# Allegro board PE300_R11_Board_source_file.brd
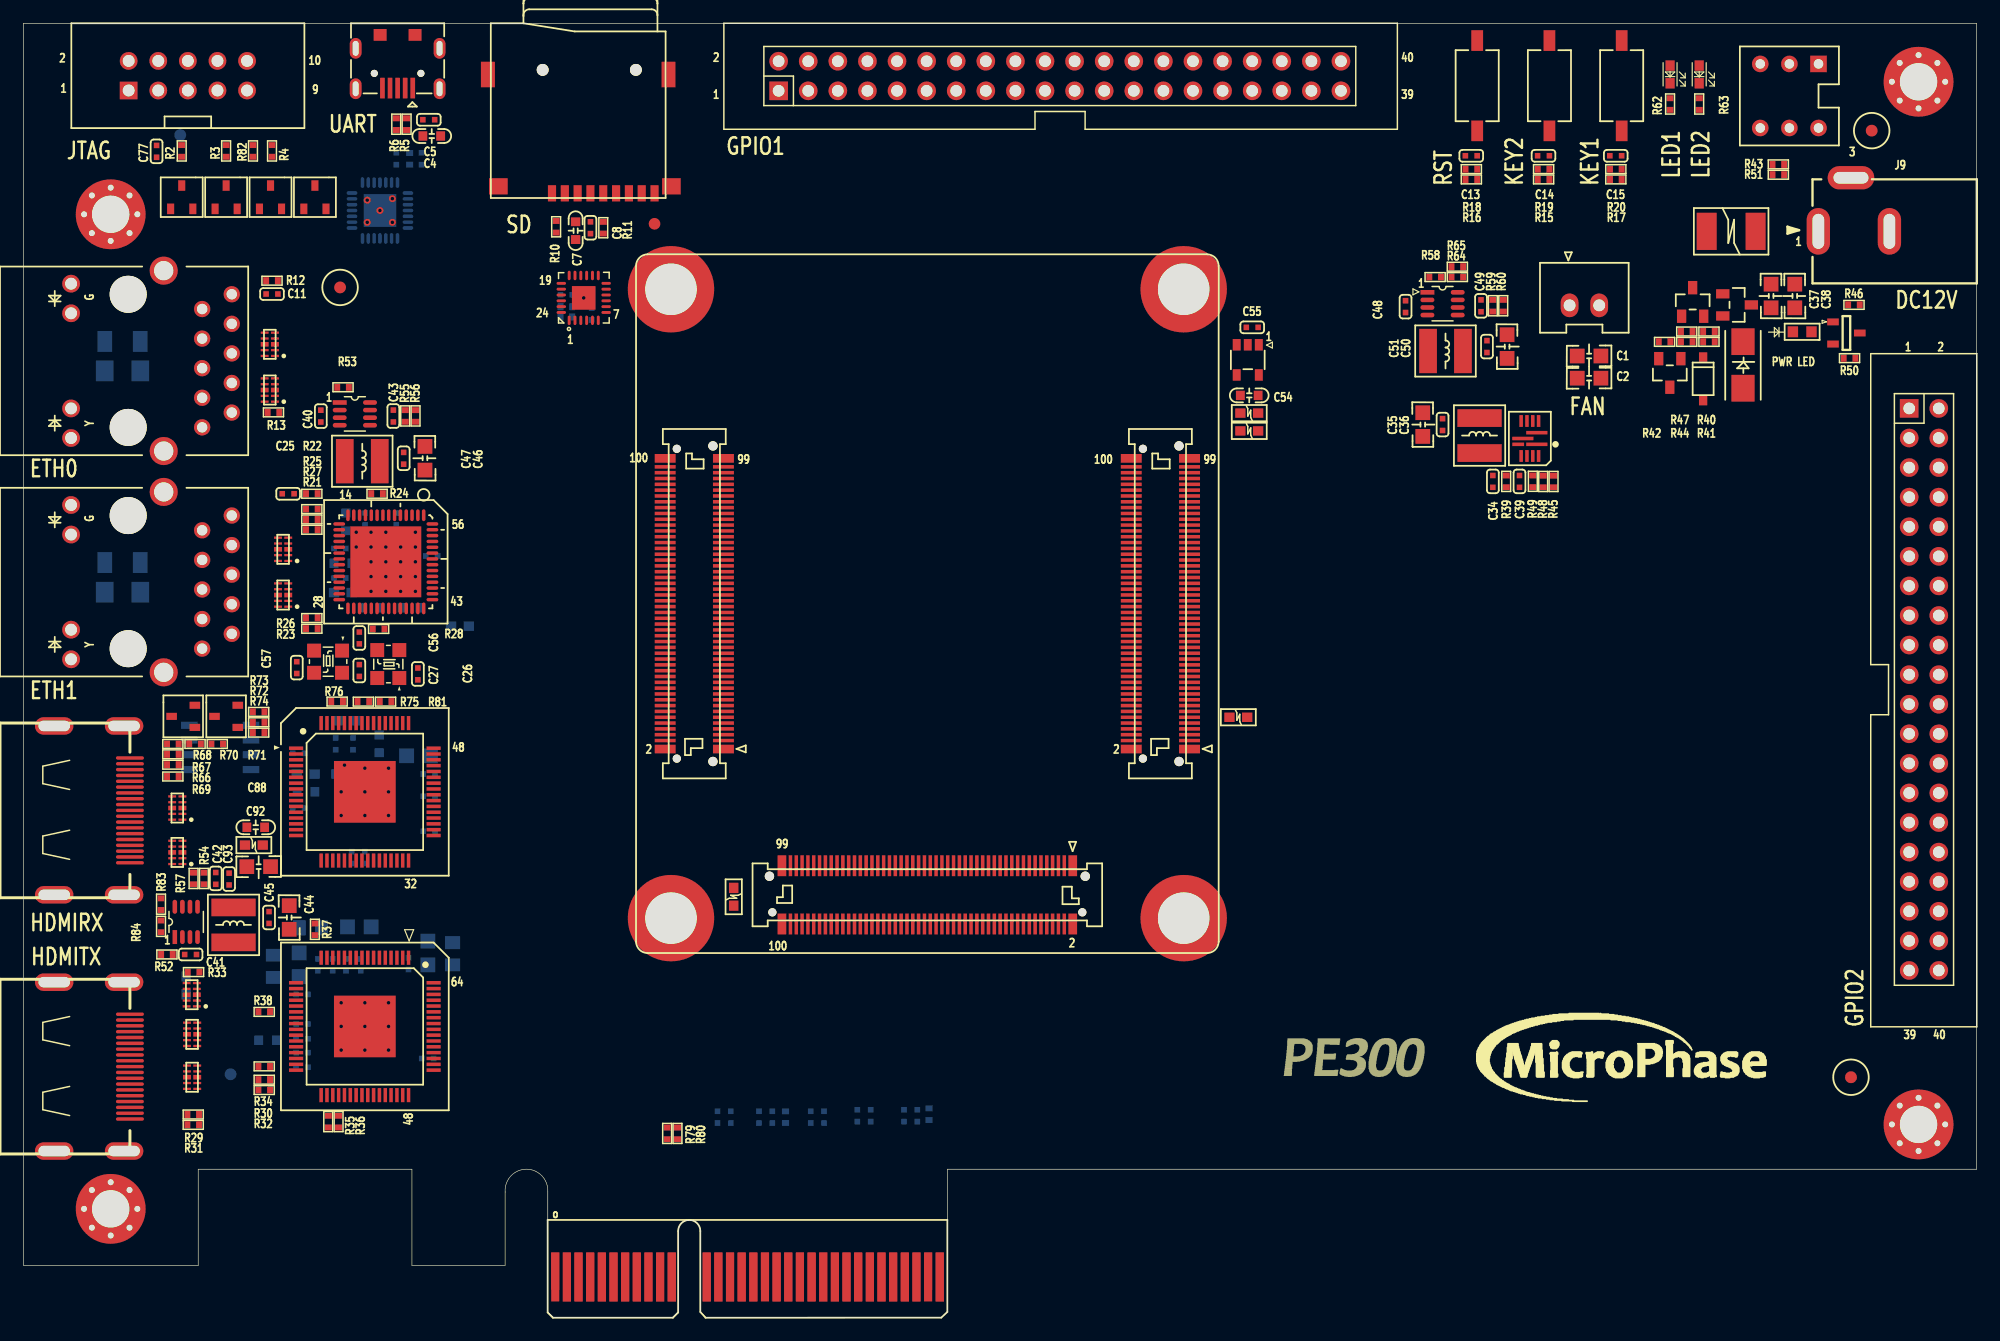
[diagram p0: board, top side]
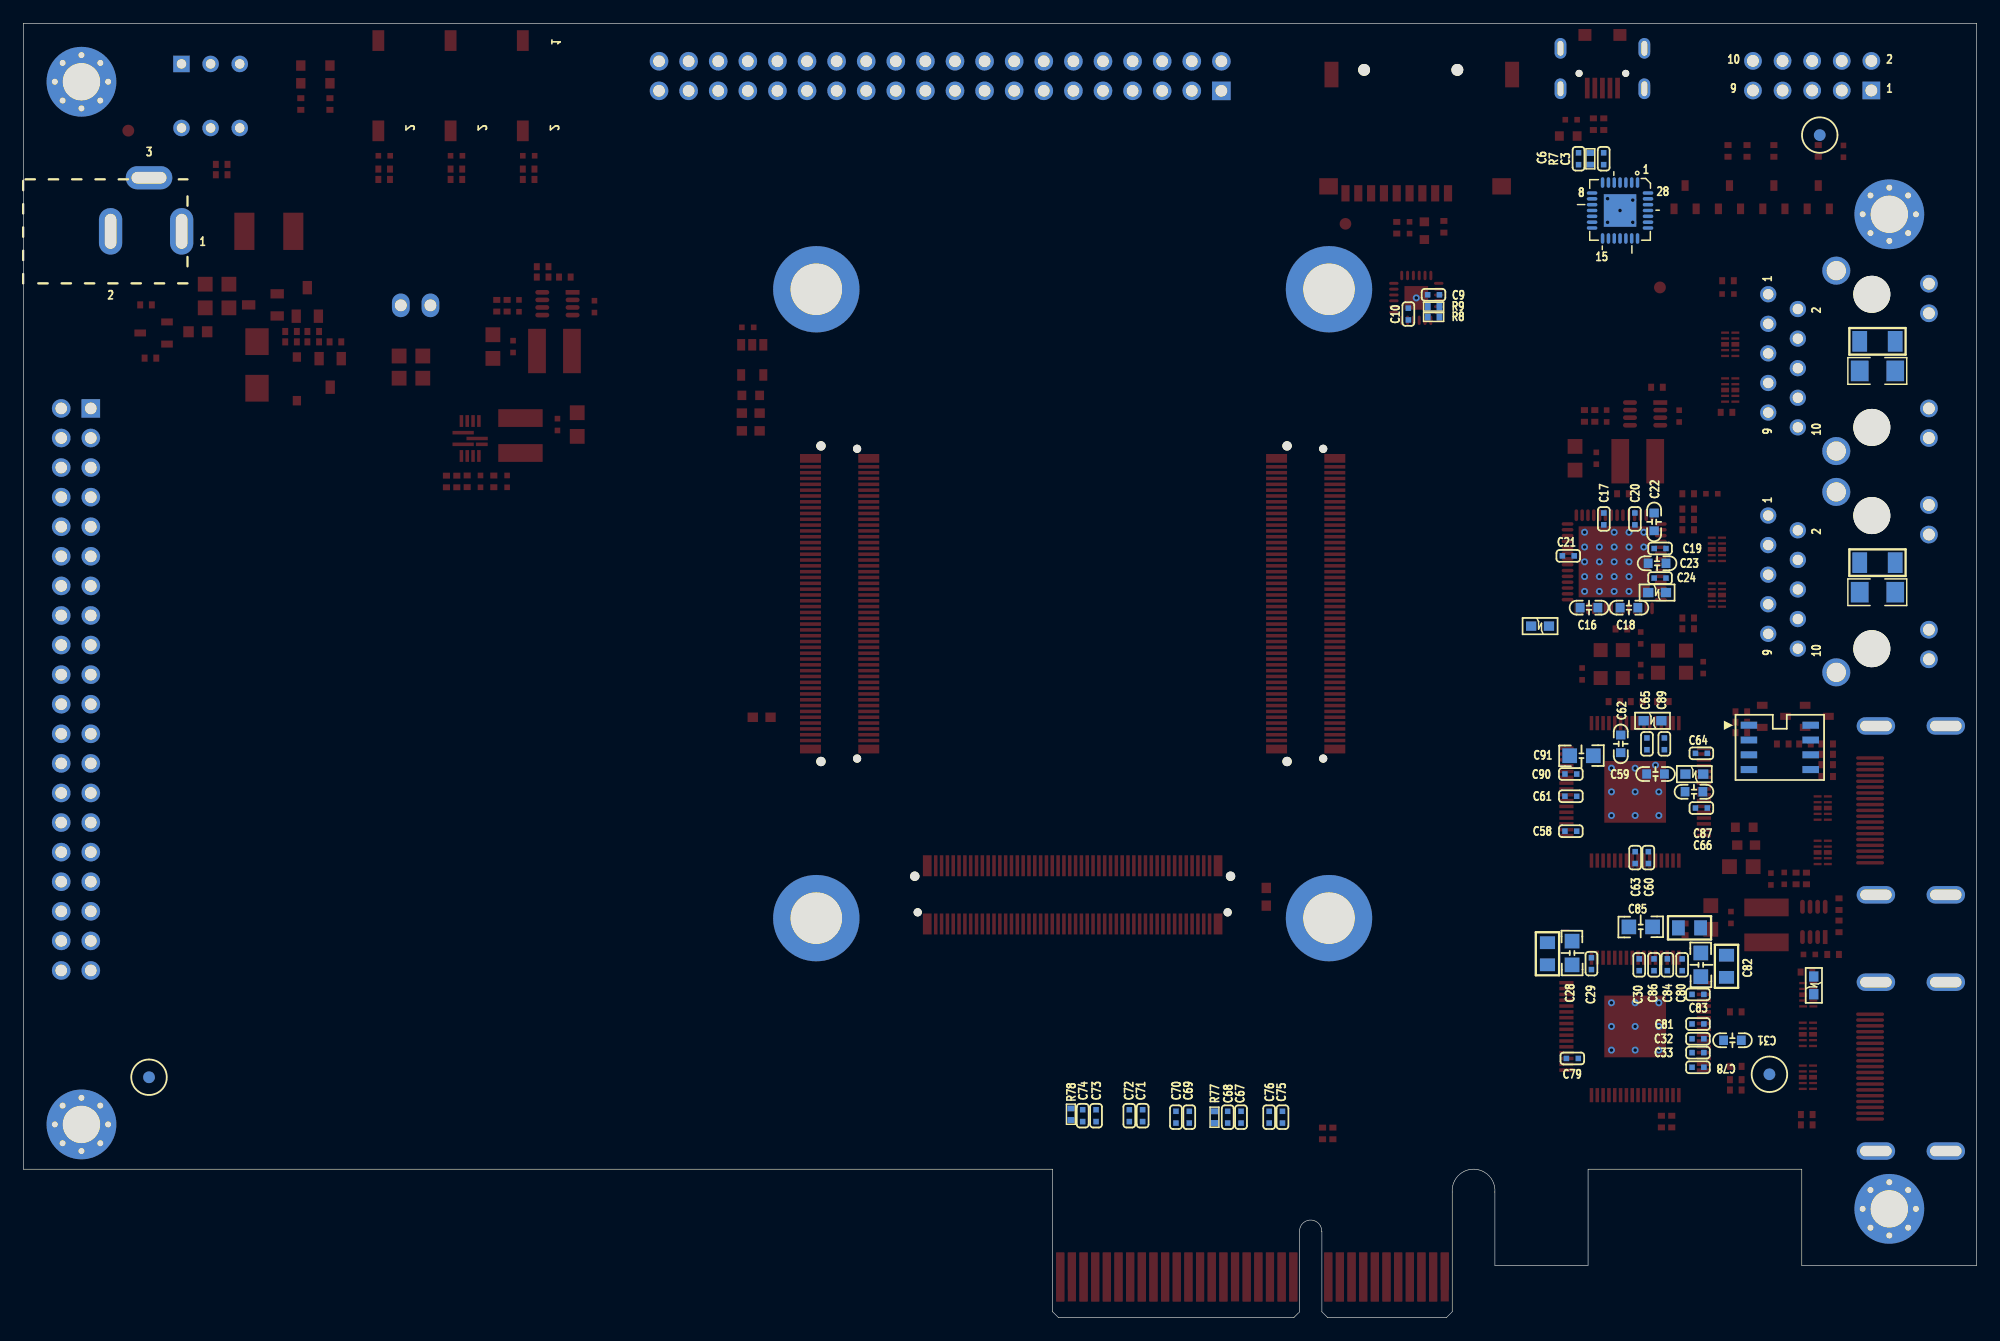
[diagram p1: board, bottom side, seen from below]

Outline 167.64 x 111.15 mm; copper layers: TOP, GND02, VCC03, BOTTOM. Coordinates in mm from the lower left corner of the outline.
Outline path: 0,111.15 167.64,111.15 167.64,12.75 79.3,12.75 79.3,0.51 78.79,0 58.61,0 58.12,0.5 58.12,7.42 arc(57.16,8.38) 56.21,7.42 56.2,7.42 56.2,0.51 55.69,0 45.52,0 45.01,0.51 45.01,10.79 arc(43.18,12.75) 41.35,10.79 41.35,4.5 33.35,4.5 33.35,12.75 15.01,12.75 15.01,4.5 0,4.5 0,111.15

## Design rules (mm)
net group DIFFPAIR8: nets N18052822 N18052826
net group DIFFPAIR9: nets USB2UART_DM USB2UART_DP
net group DIFFPAIR10: nets N18612501 N18612505
net group DIFFPAIR11: nets N18612495 N18612509
net group DIFFPAIR12: nets N18639230 N18639232
net group DIFFPAIR13: nets N18612503 N18612507
net group DIFFPAIR14: nets N18612497 N18612499
net group GPIO2_17: nets GPIO2_17N GPIO2_17P
net group PCIE_CLK_: nets PCIE_CLK_N PCIE_CLK_P
net group PCIE_PRSNTN_X4: nets N18612627 PCIE_PRSNTN_X4
net group PCIE_RX0_: nets PCIE_RX0_N PCIE_RX0_P
net group PCIE_RX1_: nets PCIE_RX1_N PCIE_RX1_P
net group PCIE_RX2_: nets PCIE_RX2_N PCIE_RX2_P
net group PCIE_RX3_: nets PCIE_RX3_N PCIE_RX3_P
net group PCIE_TX0_: nets PCIE_TX0_N PCIE_TX0_P
net group PCIE_TX1_: nets PCIE_TX1_N PCIE_TX1_P
net group PCIE_TX2_: nets PCIE_TX2_N PCIE_TX2_P
net group PCIE_TX3_: nets PCIE_TX3_N PCIE_TX3_P
net group TMDS_RX0_: nets TMDS_RX0_N TMDS_RX0_P
net group TMDS_RX1_: nets TMDS_RX1_N TMDS_RX1_P
net group TMDS_RX2_: nets TMDS_RX2_N TMDS_RX2_P
net group TMDS_RXC_: nets TMDS_RXC_N TMDS_RXC_P
net group VCC_1V0: nets N18080938 VCC_1V0
net group VCC_1V8: nets N18080771 VCC_1V8
net group XADC_V: nets XADC_VN XADC_VP
net group DIFF-LOCAL: nets ETH0_MDI0_N ETH0_MDI0_P ETH0_MDI1_N ETH0_MDI1_P ETH0_MDI2_N ETH0_MDI2_P ETH0_MDI3_N ETH0_MDI3_P ETH1_MDI0_N ETH1_MDI0_P ETH1_MDI1_N ETH1_MDI1_P ETH1_MDI2_N ETH1_MDI2_P ETH1_MDI3_N ETH1_MDI3_P GPIO1_0N GPIO1_0P GPIO1_1N GPIO1_1P GPIO1_2N GPIO1_2P GPIO1_3N GPIO1_3P GPIO1_4N GPIO1_4P GPIO1_5N GPIO1_5P GPIO1_6N GPIO1_6P GPIO1_7N GPIO1_7P GPIO1_8N GPIO1_8P GPIO1_9N GPIO1_9P GPIO1_10N GPIO1_10P GPIO1_11N GPIO1_11P GPIO1_12N GPIO1_12P GPIO1_13N GPIO1_13P GPIO1_14N GPIO1_14P GPIO1_15N GPIO1_15P GPIO1_16N GPIO1_16P GPIO1_17N GPIO1_17P GPIO2_0N GPIO2_0P GPIO2_1N GPIO2_1P GPIO2_2N GPIO2_2P GPIO2_3N GPIO2_3P GPIO2_4N GPIO2_4P GPIO2_5N GPIO2_5P GPIO2_6N GPIO2_6P GPIO2_7N GPIO2_7P GPIO2_8N GPIO2_8P GPIO2_9N GPIO2_9P GPIO2_10N GPIO2_10P GPIO2_11N GPIO2_11P GPIO2_12N GPIO2_12P GPIO2_13N GPIO2_13P GPIO2_14N GPIO2_14P GPIO2_15N GPIO2_15P GPIO2_16N GPIO2_16P TMDS_TX0_N TMDS_TX0_P TMDS_TX1_N TMDS_TX1_P TMDS_TX2_N TMDS_TX2_P TMDS_TXC_N TMDS_TXC_P
net group HDMI: nets HDMI_RX_DE HDMI_RX_HS HDMI_RX_LLC HDMI_RX_P0 HDMI_RX_P1 HDMI_RX_P2 HDMI_RX_P3 HDMI_RX_P4 HDMI_RX_VS
net group HDMI_TX: nets HDMI_TX_CLK HDMI_TX_DE HDMI_TX_HS HDMI_TX_VS

## Placement (name value [footprint] x y rotation side)
B1  BLM18PG121SN1D  [0603L]  105.21 76.15 180 top
B2  BLM18PG121SN1D  [0603L]  104.27 51.56 180 top
B3  BLM18PG121SN1D  [0603L]  60.97 36.14 90 top
B4  BLM18PG121SN1D  [0603L]  37.47 59.38 0 bottom
B5  BLM18PG121SN1D  [0603L]  27.43 62.26 0 bottom
B8  BLM18PG121SN1D(NC)  [0603L]  105.21 77.67 180 top
B9  BLM18PG121SN1D  [0603L]  27.82 51.26 180 bottom
B10  BLM18PG121SN1D  [0603L]  19.79 40.58 0 top
B11  BLM18PG121SN1D  [0603L]  24.23 46.68 180 bottom
C1  10uF/25V  [0805C]  134.37 82.58 270 top
C2  10uF/25V  [0805C]  134.37 80.67 270 top
C3  0.1uf  [0402C]  32.01 99.52 0 bottom
C4  10uF/10V  [0603C]  35.05 101.47 270 top
C5  0.1uf  [0402C]  34.8 102.86 270 top
C6  0.1uf  [0402C]  34.17 99.52 0 bottom
C7  10uF/6.3V  [0603C]  47.4 93.34 180 top
C8  0.1uf  [0402C]  48.67 93.59 180 top
C9  0.1uF  [0402C]  46.62 87.83 270 bottom
C10  0.1uF  [0402C]  48.77 86.18 0 bottom
C11  0.1uf  [0402C]  21.34 87.9 90 top
C12  100pF/1000V  [1206C]  8.52 81.29 180 bottom
C13  0.1uF  [0402C]  124.26 99.77 270 top
C14  0.1uF  [0402C]  130.46 99.77 270 top
C15  0.1uF  [0402C]  136.66 99.77 270 top
C16  10uF/6.3V  [0603C]  33.27 60.97 90 bottom
C17  0.1uF  [0402C]  32 68.59 180 bottom
C18  10uF/6.3V  [0603C]  29.84 60.97 90 bottom
C19  0.1uF  [0402C]  27.17 66.05 270 bottom
C20  0.1uF  [0402C]  29.33 68.59 180 bottom
C21  0.1uF  [0402C]  35.05 65.41 90 bottom
C22  10uF/6.3V  [0603C]  27.68 68.33 180 bottom
C23  10uF/6.3V  [0603C]  27.43 64.78 270 bottom
C24  0.1uF  [0402C]  27.17 63.51 270 bottom
C25  0.1uf  [0402C]  22.73 70.75 90 top
C26  12pF  [0402C]  33.86 55.28 180 top
C27  12pF  [0402C]  28.84 55.57 0 top
C28  47uF/6.3V  [0805C]  34.73 31.32 0 bottom
C29  0.1uF  [0402C]  33.06 30.4 0 bottom
C30  0.1uF  [0402C]  28.96 30.3 0 bottom
C31  10uF/6.3V  [0603C]  20.96 23.82 90 bottom
C32  0.1uF  [0402C]  23.92 23.95 270 bottom
C33  0.1uF  [0402C]  23.92 22.76 270 bottom
C34  0.1uF  [0402C]  126.12 71.81 0 top
C35  47uF/10V  [0805C]  120.1 76.69 180 top
C36  0.1uF  [0402C]  121.8 76.69 180 top
C37  10uF/25V  [0805C]  150 87.73 0 top
C38  10uF/25V  [0805C]  152.03 87.73 0 top
C39  0.1uF  [0402C]  128.4 71.81 0 top
C40  0.1uF  [0402C]  25.53 77.42 180 top
C41  0.1uF  [0402C]  14.36 31.19 270 top
C42  15pF  [0402C]  16.52 37.72 0 top
C43  15pF  [0402C]  31.76 77.42 180 top
C44  47uF/6.3V  [0805C]  22.82 34.36 180 top
C45  0.1uF  [0402C]  21.09 34.36 180 top
C46  47uF/6.3V  [0805C]  34.47 73.8 0 top
C47  0.1uF  [0402C]  32.65 73.8 0 top
C48  0.1uF  [0402C]  118.63 86.82 180 top
C49  15pF  [0402C]  125.1 86.89 180 top
C50  47uF/6.3V  [0805C]  127.34 83.39 180 top
C51  0.1uF  [0402C]  125.61 83.39 180 top
C52  100pF/1000V  [1206C]  8.52 62.29 180 bottom
C54  10uF/6.3V  [0603C]  105.21 79.2 270 top
C55  0.1uF  [0402C]  105.47 85.04 270 top
C56  15pF  [0402C]  28.84 58.37 180 top
C57  15pF  [0402C]  23.47 55.82 180 top
C58  0.1uF  [0402C]  34.83 41.78 90 bottom
C59  10uF/6.3V  [0603C]  27.57 46.68 270 bottom
C60  0.1uF  [0402C]  28.18 39.51 0 bottom
C61  0.1uF  [0402C]  34.83 44.78 90 bottom
C62  10uF/6.3V  [0603C]  30.55 49.27 180 bottom
C63  0.1uF  [0402C]  29.31 39.51 0 bottom
C64  0.1uF  [0402C]  23.63 48.46 270 bottom
C65  0.1uF  [0402C]  28.3 49.27 180 bottom
C66  0.1uF  [0402C]  23.63 43.76 270 bottom
C67  0.1uF  [0402C]  63.13 17.22 180 bottom
C68  0.1uF  [0402C]  64.28 17.22 180 bottom
C69  0.1uF  [0402C]  67.58 17.22 180 bottom
C70  0.1uF  [0402C]  68.72 17.22 180 bottom
C71  0.1uF  [0402C]  71.58 17.35 180 bottom
C72  0.1uF  [0402C]  72.72 17.35 180 bottom
C73  0.1uF  [0402C]  75.58 17.35 180 bottom
C74  0.1uF  [0402C]  76.72 17.35 180 bottom
C75  0.1uF  [0402C]  59.58 17.22 180 bottom
C76  0.1uF  [0402C]  60.72 17.22 180 bottom
C77  0.1uF  [0402C]  11.44 100.15 0 top
C78  0.1uF  [0402C]  23.92 21.51 90 bottom
C79  0.1uF  [0402C]  34.7 22.26 90 bottom
C80  0.1uF  [0402C]  25.28 30.3 0 bottom
C81  0.1uF  [0402C]  23.92 25.22 270 bottom
C82  47uF/6.3V  [0805C]  23.68 30.3 0 bottom
C83  0.1uF  [0402C]  23.92 27.76 270 bottom
C84  0.1uF  [0402C]  26.55 30.3 180 bottom
C85  47uF/6.3V  [0805C]  28.84 33.56 270 bottom
C86  0.1uF  [0402C]  27.69 30.3 180 bottom
C87  10uF/6.3V  [0603C]  24.26 45.16 270 bottom
C88  10uF/6.3V  [0603C]  19.95 42.11 270 top
C89  0.1uF  [0402C]  26.8 49.27 180 bottom
C90  0.1uF  [0402C]  34.83 46.68 90 bottom
C91  47uF/6.3V  [0805C]  33.92 48.25 90 bottom
C92  47uF/6.3V  [0805C]  20.2 38.73 90 top
C93  0.1uF  [0402C]  17.66 37.67 180 top
D1  BAT54S/SOT  [SOT23-236AB]  25.03 96.21 0 top
D2  BAT54S/SOT  [SOT23-236AB]  13.6 96.21 0 top
D3  BAT54S/SOT  [SOT23-236AB]  17.41 96.21 0 top
D4  BAT54S/SOT  [SOT23-236AB]  21.22 96.21 0 top
D5  SS36  [SMA]  147.58 81.81 90 top
D6  RED_LED  [0603LED_AK]  152.66 84.66 180 top
D7  BZX84C13  [SOD123_AK]  144.16 80.62 270 top
D8  GREEN_LED  [0603LED]  141.33 106.75 270 top
D9  GREEN_LED  [0603LED]  143.83 106.75 270 top
F1  2A  [1812F]  146.57 93.28 180 top
F2  SMD0603-050  [0603F]  13.98 28.53 270 bottom
J1  JTAG  [HDR254F-2X5X850]  14.12 106.65 90 top
J3  CON2  [XH2_1X2_2P54MM]  133.97 86.93 270 top
J4  USB_MicroType  [USBMICRO_H]  32.12 105.58 180 top
J5  MicroSD  [TF-15-15B]  47.62 103.65 180 top
J6  HR911130A  [RJ45_HR911130A]  9 82.16 90 top
J7  HR911130A  [RJ45_HR911130A]  9 63.16 90 top
J8  HDMI  [HDMI19S]  9.15 21.56 270 top
J9  DC_JACK  [DC_0050]  160.15 93.28 0 top
J10  HDMI  [HDMI19S]  9.15 43.56 270 top
J11  PCIE_SLOT  [FINGER-PCI-EX4]  70.65 4.2 0 top
JM1  CON50x2 REC  [QT51A01-38200-7H]  97.59 61.31 180 top
JM2  CON50x2 REC  [QT51A01-38200-7H]  77.58 36.31 270 top
JM3  CON50x2 REC  [QT51A01-38200-7H]  57.58 61.31 180 top
JP1  CON40A  [IDC40-2_54A]  88.95 106.62 0 top
JP2  CON40A  [IDC40-2_54A]  163.12 53.95 270 top
K1  SW_2P  [SW2_3X6]  124.77 105.79 270 top
K2  SW_2P  [SW2_3X6]  130.97 105.79 270 top
K3  SW_2P  [SW2_3X6]  137.17 105.79 270 top
L1  1.5uH  [L4020]  124.97 75.75 90 top
L2  1uH  [L4020]  29.09 73.54 0 top
L3  1uH  [L4020]  18.04 33.73 90 top
L4  1uH  [L4020]  122.05 83.01 0 top
L5  10uH  [L0805]  36.84 31.25 90 bottom
L6  10uH  [L0805]  21.47 30.17 90 bottom
L7  10uH  [L0805]  24.65 33.48 180 bottom
M1  Hole  [HOLE32CIR60]  7.5 94.75 0 top
M2  Hole  [HOLE32CIR60]  7.5 9.35 0 top
M3  Hole  [HOLE32CIR60]  162.65 16.6 0 top
M4  Hole  [HOLE32CIR60]  162.65 106.13 0 top
M5  Hole  [HOLE174-292]  55.59 88.31 0 top
M6  Hole  [HOLE174-292]  55.59 34.31 0 top
M7  Hole  [HOLE174-292]  99.59 34.31 0 top
M8  Hole  [HOLE174-292]  99.58 88.31 0 top
NOREF  -  []  151.57 107.66 0 top
NOREF#2  -  []  144.47 93.28 0 top
NOREF#3  -  []  14.25 47.06 0 top
NOREF#4  -  []  14.72 50.69 90 top
NOREF#5  -  [unnamed#2]  156.85 20.65 0 top
NOREF#6  -  [unnamed#2]  27.19 88.47 0 top
NOREF#7  -  []  149.07 107.66 0 top
NOREF#8  -  []  32.11 92.67 90 top
NOREF#9  -  []  18.41 50.69 90 top
NOREF#10  -  []  18.36 95.21 90 top
NOREF#11  -  []  25.98 95.21 90 top
NOREF#12  -  []  77.58 36.31 0 top
NOREF#13  -  []  12.65 95.21 0 top
NOREF#14  -  []  19.55 47.06 90 top
NOREF#15  -  []  24.08 95.21 0 top
NOREF#16  -  [unnamed#2]  158.63 101.93 0 top
NOREF#17  -  []  33.01 93.57 90 top
NOREF#18  -  []  22.17 95.21 90 top
NOREF#19  -  []  19.55 47.06 90 top
NOREF#20  -  []  20.27 95.21 0 top
NOREF#21  -  []  33.01 93.57 90 top
NOREF#22  -  []  16.46 95.21 0 top
NOREF#23  -  []  57.58 61.31 0 top
NOREF#24  -  []  164.32 109.16 90 top
NOREF#25  -  []  14.55 95.21 90 top
NOREF#26  -  []  16.41 51.64 90 top
NOREF#27  -  []  28.21 93.57 90 top
NOREF#28  -  []  12.72 51.64 90 top
NOREF#29  -  []  149.07 102.16 90 top
NOREF#30  -  []  155.82 109.16 0 top
NOREF#31  -  []  77.58 36.31 90 top
NOREF#32  -  []  77.58 36.31 90 top
NOREF#33  -  [unnamed#2]  156.85 20.65 180 bottom
NOREF#34  -  [unnamed#2]  17.79 20.9 180 bottom
NOREF#35  -  [unnamed#2]  13.47 101.55 180 bottom
Q2  -  [AO3415]  143.27 87.22 0 top
Q3  -  [AO3415]  147.08 86.97 270 top
Q4  MMBTA92LT1G  [SOT23-3]  141.3 81.12 180 top
Q5  MMBT5551  [SOT23]  156.46 84.55 0 top
Q6  2N7002  [SOT23-236AB]  17.41 51.64 90 top
Q7  2N7002  [SOT23-236AB]  13.72 51.64 90 top
R2  33R  [0402R]  13.6 100.19 90 top
R3  33R  [0402R]  17.41 100.19 90 top
R4  33R  [0402R]  21.34 100.19 90 top
R5  33R  [0402R]  32.89 102.48 270 top
R6  33R  [0402R]  32.01 102.48 270 top
R7  4.7K  [0402R]  33.15 99.51 270 bottom
R8  4.7K(NC)  [0402R]  46.61 85.93 0 bottom
R9  4.7K  [0402R]  46.61 86.82 180 bottom
R10  4.7K  [0402R]  45.73 93.67 270 top
R11  4.7K(NC)  [0402R]  49.77 93.59 270 top
R12  330R  [0402R]  21.34 89.04 0 top
R13  330R  [0402R]  21.47 77.74 0 top
R14  1M  [1206R]  8.52 83.83 0 bottom
R15  10K  [0402R]  130.47 97.74 0 top
R16  10K  [0402R]  124.27 97.74 0 top
R17  10K  [0402R]  136.67 97.74 0 top
R18  330R  [0402R]  124.27 98.63 0 top
R19  330R  [0402R]  130.47 98.63 0 top
R20  330R  [0402R]  136.67 98.63 0 top
R21  4.7K  [0402R]  24.76 67.66 0 top
R22  330R  [0402R]  24.76 70.75 0 top
R23  330R  [0402R]  24.76 59.16 0 top
R24  4.7K  [0402R]  30.36 70.75 0 top
R25  0R  [0402R]  24.76 69.43 0 top
R26  4.99K 1%  [0402R]  24.76 60.08 0 top
R27  0R(NC)  [0402R]  24.76 68.54 0 top
R28  10M(NC)  [0402R]  30.49 59.14 180 top
R29  2K  [0402R]  14.58 17.45 180 top
R30  0R  [0402R]  20.68 20.44 0 top
R31  2K  [0402R]  14.58 16.56 180 top
R32  0R  [0402R]  20.68 19.55 0 top
R33  10K  [0402R]  14.61 29.68 180 top
R34  2K  [0402R]  20.68 21.58 0 top
R35  4.7K  [0402R]  26.17 16.84 90 top
R36  4.7K  [0402R]  27.06 16.84 90 top
R37  887R 1%  [0402R]  25.03 33.35 90 top
R38  10K  [0402R]  20.68 26.26 0 top
R39  3R3  [0402R]  127.26 71.81 270 top
R40  30K  [0402R]  144.66 84.68 180 top
R41  330R  [0402R]  144.66 83.79 180 top
R42  4.7K  [0402R]  140.85 83.79 0 top
R43  0R(NC)  [0402R]  150.62 99.03 180 top
R44  10K  [0402R]  142.76 83.79 180 top
R45  100K  [0402R]  131.33 71.8 90 top
R46  2K  [0402R]  157.11 86.97 0 top
R47  30K  [0402R]  142.76 84.68 180 top
R48  33K  [0402R]  130.44 71.8 270 top
R49  4.7K  [0402R]  129.55 71.82 270 top
R50  10K  [0402R]  156.73 82.39 180 top
R51  10K  [0402R]  150.62 98.14 180 top
R52  4.7K  [0402R]  12.33 31.19 0 top
R53  4.7K  [0402R]  27.44 79.89 0 top
R54  20K 1%  [0402R]  15.5 37.71 90 top
R55  6.8K 1%  [0402R]  32.77 77.43 270 top
R56  10K 1%  [0402R]  33.66 77.43 90 top
R57  10K 1%  [0402R]  14.61 37.71 270 top
R58  4.7K  [0402R]  121.17 89.36 0 top
R59  45.3K 1%  [0402R]  126.12 86.89 270 top
R60  10K 1%  [0402R]  127.01 86.89 90 top
R61  1M  [1206R]  8.52 64.83 0 bottom
R62  330R  [0402R]  141.33 104.21 90 top
R63  330R  [0402R]  143.83 104.21 90 top
R64  0R  [0402R]  123.07 89.36 0 top
R65  0R(NC)  [0402R]  123.07 90.24 0 top
R66  47K  [0402R]  12.83 47.49 180 top
R67  47K  [0402R]  12.83 48.38 180 top
R68  1K  [0402R]  12.83 49.26 180 top
R69  0R(NC)  [0402R]  12.83 46.47 180 top
R70  10K(NC)  [0402R]  14.74 49.26 0 top
R71  100K  [0402R]  16.64 49.26 0 top
R72  0R  [0402R]  20.2 51.13 180 top
R73  0R(NC)  [0402R]  20.2 52.02 180 top
R74  1K(NC)  [0402R]  20.2 50.24 0 top
R75  4.7K  [0402R]  29.19 52.9 180 top
R76  10M(NC)  [0402R]  26.93 52.91 180 top
R77  0R(NC)  [0402R]  65.41 17.22 270 bottom
R78  0R  [0402R]  77.74 17.47 270 bottom
R79  0R(NC)  [0402R]  55.25 15.82 270 top
R80  4.7K(NC)  [0402R]  56.14 15.82 90 top
R81  10K  [0402R]  31.09 52.9 0 top
R82  33R  [0402R]  19.71 100.19 90 top
R83  0R(NC)  [0402R]  11.82 35.51 270 top
R84  0R  [0402R]  11.82 33.6 90 top
SW1  SW  [SW6-2P5-5P5]  151.57 104.91 180 top
TP1  TP_R  [TP4]  54.17 93.93 180 top
U1  CP2102  [QFN28-0P5-5X5]  30.61 95.07 270 bottom
U3  TXS02612RTWR  [QFN24-0P5-4X4]  48.09 87.57 90 top
U6  88E1512  [QFN56-0P5-8X8TS]  31.11 64.91 270 top
U7  ADV7513  [QFP64_10X10_0P5_T]  29.31 25.01 270 top
U10  TPD4E05U06  [ESD_0524P]  14.46 27.73 90 top
U15  -  [NB679]  129.29 75.49 270 top
U16  MP2143DJ  [SOT23-8]  28.45 77.61 270 top
U17  MP2143DJ  [SOT23-8]  13.98 33.98 0 top
U18  MP2143DJ  [SOT23-8]  121.8 87.07 270 top
U19  TPD4E05U06  [ESD_0524P]  21.15 79.66 90 top
U20  TPD4E05U06  [ESD_0524P]  21.15 83.58 90 top
U21  TPD4E05U06  [ESD_0524P]  22.3 62.05 90 top
U22  TPD4E05U06  [ESD_0524P]  22.3 65.98 90 top
U23  SPX3819M5-X-X(NC)  [SOT-23]  105.08 82.24 180 top
U24  ADV7611BSWZ  [QFP64_10X10_0P5_T]  29.31 45.15 0 top
U25  24C02(NC)  [SO8N-1P27-3P9X4P9]  16.9 48.97 270 bottom
U28  TPD4E05U06  [ESD_0524P]  14.49 24.33 90 top
U29  TPD4E05U06  [ESD_0524P]  14.49 20.65 90 top
U30  TPD4E05U06  [ESD_0524P]  13.22 39.95 90 top
U31  TPD4E05U06  [ESD_0524P]  13.22 43.76 90 top
Y2  25M  [XTAL3225M]  31.32 56.13 90 top
Y3  28.63636M  [XTAL3225M]  26.15 56.33 180 top

## Library data of the parts
B1-B5 B8-B11 = BEAD
C1 C2 C15-C21 C23 C24 C26-C34 C40 C44 C45 C47-C52 C54 C57 C64 C66-C93 = CAP
C3-C8 C11 C25 C38 = C
C9 C10 C12-C14 C22 C35 C36 C39 C41-C43 C46 C55 C56 C58-C63 C65 = CAP: signal model: CAP_0402C_0.1UF_0.1uF
C37 = C: signal model: CAP_0402C_0.1UF_0.1uF
D1-D4 = BAT54S/SOT
D5 = DIODE
D6 D8 D9 = LED
D7 = TVS_SMAJ5_0.0CA_5V: Tolerance: *; User Part Number: *
F1 F2 = FUSE
J1 = CON10A: Tolerance: *; User Part Number: *
J3 = CON2: User Part Number: *; Tolerance: *
J4 = USB_MicroType
J5 = MicroSD_1
J6 J7 = RJ45_HR911130A: Tolerance: *; User Part Number: *
J8 J10 = HDMI
J9 = POWER_DC-JACK: Tolerance: ?; User Part Number: *********
J11 = PCIE_SLOT
JM1-JM3 = CON 50x2: User Part Number: *; Tolerance: *
JP1 JP2 = CON40A
K1-K3 = SW_2P
L1-L4 = L: User Part Number: *; Tolerance: *
L5-L7 = L: Tolerance: ?; User Part Number: L0805
M1-M8 TP1 = TP_R
Q2 Q3 = AO3415
Q4 = MMBT5401L_0
Q5 = NPN2
Q6 Q7 = N_2N7002
R2-R4 R8 R9 R21 R24-R27 R29-R38 R62 R63 R66-R73 R75 R77 R79-R82 = RESISTOR
R5-R7 R10-R20 R22 R23 R28 R40-R44 R46-R48 R50 R51 R61 R76 = R
R39 R45 R49 R52-R60 R64 R65 R83 R84 = RES
R74 = RESISTOR: signal model: RES_0402R_22R_22R
R78 = RESISTOR: signal model: RES_0402R_0R(NC)_0R(NC)
SW1 = SW5
U1 = USB2UART_CP2102
U3 = LevelShift_TXS02612_SDIO
U6 = 88E1512
U7 = ADV7513: User Part Number: *; Tolerance: *
U10 U19-U22 U28-U31 = RCLAMP0564P
U15 = NB679: User Part Number: *; Tolerance: *
U16-U18 = MP2143
U23 = SPX3819M5-2-5
U24 = ADV7611BSWZ: User Part Number: *; Tolerance: *
U25 = M24C02
Y2 Y3 = CRYSTAL_4pin

## Footprints (pads in the part's own frame, mm; a bottom-side part is the same pattern mirrored in y, then rotated)
0402C
  rect 0.483x0.483 smd: 1(0,0.508) 2(0,-0.508)
0402R
  rect 0.508x0.61 smd: 1(-0.5,0) 2(0.5,0)
0603C
  rect 0.813x0.762 smd: 1(0,0.762) 2(0,-0.762)
0603F
  rect 0.889x0.813 smd: 1(-0.762,0) 2(0.762,0)
0603L
  rect 0.889x0.813 smd: 1(-0.762,0) 2(0.762,0)
0603LED
  rect 0.9x0.8 smd: A(-0.762,0) K(0.762,0)
0603LED_AK
  rect 0.9x0.95 smd: A(0.8,0) K(-0.8,0)
0805C
  rect 1.27x1.27 smd: 1(0,1.016) 2(0,-1.016)
1206C
  rect 1.524x1.778 smd: 1(-1.524,0) 2(1.524,0)
1206R
  rect 1.27x1.778 smd: 1(-1.524,0) 2(1.524,0)
1812F
  rect 1.727x3.2 smd: 1(-2.1,0) 2(2.1,0)
AO3415
  rect 0.8x1.15 smd: D(0,1.225) G(-0.95,-1.225) S(0.95,-1.225)
DC_0050
  oval 2x4 hole 1x3: 1(-6.1,0) 2(0,0)
  oval 4x2 hole 3x1: 3(-3.3,4.6)
ESD_0524P
  rect 0.2x0.68 smd: 1(-1,-0.44) 2(-0.5,-0.44) 4(0.5,-0.44) 5(1,-0.44) 6(1,0.44) 7(0.5,0.44) 9(-0.5,0.44) 10(-1,0.44)
  rect 0.4x0.68 smd: 3(0,-0.44) 8(0,0.44)
FINGER-PCI-EX4
  rect 0.7x3.2 smd: A1(-25,-0.2) B17(-7,-0.2) B31(7,-0.2)
  rect 0.7x4.2 smd: A2(-24,-0.7) A3(-23,-0.7) A4(-22,-0.7) A5(-21,-0.7) A6(-20,-0.7) A7(-19,-0.7) A8(-18,-0.7) A9(-17,-0.7) A10(-16,-0.7) A11(-15,-0.7) A12(-12,-0.7) A13(-11,-0.7) A14(-10,-0.7) A15(-9,-0.7) A16(-8,-0.7) A17(-7,-0.7) A18(-6,-0.7) A19(-5,-0.7) A20(-4,-0.7) A21(-3,-0.7) A22(-2,-0.7) A23(-1,-0.7) A24(0,-0.7) A25(1,-0.7) A26(2,-0.7) A27(3,-0.7) A28(4,-0.7) A29(5,-0.7) A30(6,-0.7) A31(7,-0.7) A32(8,-0.7) B1(-25,-0.7) B2(-24,-0.7) B3(-23,-0.7) B4(-22,-0.7) B5(-21,-0.7) B6(-20,-0.7) B7(-19,-0.7) B8(-18,-0.7) B9(-17,-0.7) B10(-16,-0.7) B11(-15,-0.7) B12(-12,-0.7) B13(-11,-0.7) B14(-10,-0.7) B15(-9,-0.7) B16(-8,-0.7) B18(-6,-0.7) B19(-5,-0.7) B20(-4,-0.7) B21(-3,-0.7) B22(-2,-0.7) B23(-1,-0.7) B24(0,-0.7) B25(1,-0.7) B26(2,-0.7) B27(3,-0.7) B28(4,-0.7) B29(5,-0.7) B30(6,-0.7) B32(8,-0.7)
HDMI19S
  oval 0.3x2.4 smd: 1(4.5,0) 2(4,0) 3(3.5,0) 4(3,0) 5(2.5,0) 6(2,0) 7(1.5,0) 8(1,0) 9(0.5,0) 10(0,0) 11(-0.5,0) 12(-1,0) 13(-1.5,0) 14(-2,0) 15(-2.5,0) 16(-3,0) 17(-3.5,0) 18(-4,0) 19(-4.5,0)
  oval 1.5x3.3 hole 0.9x2.7: BO1(7.25,-0.5) BO2(-7.25,-0.5) BO3(7.25,-6.5) BO4(-7.25,-6.5)
HDR254F-2X5X850
  rect 1.524x1.524 hole 1.016: 1(-1.27,5.08)
  round 1.524 hole 1.016: 2(1.27,5.08) 3(-1.27,2.54) 4(1.27,2.54) 5(-1.27,0) 6(1.27,0) 7(-1.27,-2.54) 8(1.27,-2.54) 9(-1.27,-5.08) 10(1.27,-5.08)
HOLE32CIR60
  round 1.016 hole 0.508: (-2.286,0) (-1.617,1.617) (-1.617,-1.617) (0,2.286) (0,-2.286) (1.617,1.617) (1.617,-1.617) (2.286,0)
  round 5.994 hole 3.2: 1(0,0)
HOLE174-292
  round 7.417 hole 4.42 unplated: (0,0)
IDC40-2_54A
  rect 1.6x1.6 hole 1: 1(-24.13,-1.27)
  round 1.6 hole 1: 2(-24.13,1.27) 3(-21.59,-1.27) 4(-21.59,1.27) 5(-19.05,-1.27) 6(-19.05,1.27) 7(-16.51,-1.27) 8(-16.51,1.27) 9(-13.97,-1.27) 10(-13.97,1.27) 11(-11.43,-1.27) 12(-11.43,1.27) 13(-8.89,-1.27) 14(-8.89,1.27) 15(-6.35,-1.27) 16(-6.35,1.27) 17(-3.81,-1.27) 18(-3.81,1.27) 19(-1.27,-1.27) 20(-1.27,1.27) 21(1.27,-1.27) 22(1.27,1.27) 23(3.81,-1.27) 24(3.81,1.27) 25(6.35,-1.27) 26(6.35,1.27) 27(8.89,-1.27) 28(8.89,1.27) 29(11.43,-1.27) 30(11.43,1.27) 31(13.97,-1.27) 32(13.97,1.27) 33(16.51,-1.27) 34(16.51,1.27) 35(19.05,-1.27) 36(19.05,1.27) 37(21.59,-1.27) 38(21.59,1.27) 39(24.13,-1.27) 40(24.13,1.27)
L0805
  rect 1.1x1.3 smd: 1(-0.95,0) 2(0.95,0)
L4020
  rect 1.524x3.81 smd: 1(-1.5,0) 2(1.5,0)
NB679
  rect 0.305x1.829 smd: 1(0.5,0.6) 2(-0.5,0.6) 7(0,-0.6)
  rect 1.016x0.305 smd: 3(-1.5,0.75) 4(-1.5,0.25) 5(-1.5,-0.25) 6(-1.5,-0.75) 9(1.5,-0.75) 10(1.5,-0.25) 11(1.5,0.25) 12(1.5,0.75)
  rect 0.305x1.016 smd: 8(0.5,-1)
QFN24-0P5-4X4
  oval 0.813x0.254 smd: 1(-1.925,1.25) 2(-1.925,0.75) 3(-1.925,0.25) 4(-1.925,-0.25) 5(-1.925,-0.75) 6(-1.925,-1.25) 13(1.925,-1.25) 14(1.925,-0.75) 15(1.925,-0.25) 16(1.925,0.25) 17(1.925,0.75) 18(1.925,1.25)
  oval 0.254x0.813 smd: 7(-1.25,-1.925) 8(-0.75,-1.925) 9(-0.25,-1.925) 10(0.25,-1.925) 11(0.75,-1.925) 12(1.25,-1.925) 19(1.25,1.925) 20(0.75,1.925) 21(0.25,1.925) 22(-0.25,1.925) 23(-0.75,1.925) 24(-1.25,1.925)
  rect 2.032x2.032 smd: 25(0,0)
QFN28-0P5-5X5
  oval 0.914x0.305 smd: 1(-2.4,1.5) 2(-2.4,1.001) 3(-2.4,0.5) 4(-2.4,0.001) 5(-2.4,-0.5) 6(-2.4,-1) 7(-2.4,-1.5) 15(2.4,-1.5) 16(2.4,-1) 17(2.4,-0.5) 18(2.4,0) 19(2.4,0.5) 20(2.4,1.001) 21(2.4,1.5)
  oval 0.305x0.914 smd: 8(-1.5,-2.4) 9(-1,-2.4) 10(-0.5,-2.4) 11(0,-2.4) 12(0.5,-2.4) 13(1,-2.4) 14(1.5,-2.4) 22(1.5,2.4) 23(1,2.4) 24(0.5,2.4) 25(0,2.4) 26(-0.5,2.4) 27(-1,2.4) 28(-1.5,2.4)
  rect 2.8x2.8 smd: 29(0,0)
QFN56-0P5-8X8TS
  oval 1.016x0.305 smd: 1(-4,3.25) 2(-4,2.75) 3(-4,2.25) 4(-4,1.75) 5(-4,1.25) 6(-4,0.75) 7(-4,0.25) 8(-4,-0.25) 9(-4,-0.75) 10(-4,-1.25) 11(-4,-1.75) 12(-4,-2.25) 13(-4,-2.75) 14(-4,-3.25) 29(4,-3.25) 30(4,-2.75) 31(4,-2.25) 32(4,-1.75) 33(4,-1.25) 34(4,-0.75) 35(4,-0.25) 36(4,0.25) 37(4,0.75) 38(4,1.25) 39(4,1.75) 40(4,2.25) 41(4,2.75) 42(4,3.25)
  oval 0.305x1.016 smd: 15(-3.25,-4) 16(-2.75,-4) 17(-2.25,-4) 18(-1.75,-4) 19(-1.25,-4) 20(-0.75,-4) 21(-0.25,-4) 22(0.25,-4) 23(0.75,-4) 24(1.25,-4) 25(1.75,-4) 26(2.25,-4) 27(2.75,-4) 28(3.25,-4) 43(3.25,4) 44(2.75,4) 45(2.25,4) 46(1.75,4) 47(1.25,4) 48(0.75,4) 49(0.25,4) 50(-0.25,4) 51(-0.75,4) 52(-1.25,4) 53(-1.75,4) 54(-2.25,4) 55(-2.75,4) 56(-3.25,4)
  rect 6.096x6.096 smd: 57(0,0)
QFP64_10X10_0P5_T
  rect 1.219x0.305 smd: 1(-5.9,3.75) 2(-5.9,3.25) 3(-5.9,2.75) 4(-5.9,2.25) 5(-5.9,1.75) 6(-5.9,1.25) 7(-5.9,0.75) 8(-5.9,0.25) 9(-5.9,-0.25) 10(-5.9,-0.75) 11(-5.9,-1.25) 12(-5.9,-1.75) 13(-5.9,-2.25) 14(-5.9,-2.75) 15(-5.9,-3.25) 16(-5.9,-3.75) 33(5.9,-3.75) 34(5.9,-3.25) 35(5.9,-2.75) 36(5.9,-2.25) 37(5.9,-1.75) 38(5.9,-1.25) 39(5.9,-0.75) 40(5.9,-0.25) 41(5.9,0.25) 42(5.9,0.75) 43(5.9,1.25) 44(5.9,1.75) 45(5.9,2.25) 46(5.9,2.75) 47(5.9,3.25) 48(5.9,3.75)
  rect 0.305x1.219 smd: 17(-3.75,-5.9) 18(-3.25,-5.9) 19(-2.75,-5.9) 20(-2.25,-5.9) 21(-1.75,-5.9) 22(-1.25,-5.9) 23(-0.75,-5.9) 24(-0.25,-5.9) 25(0.25,-5.9) 26(0.75,-5.9) 27(1.25,-5.9) 28(1.75,-5.9) 29(2.25,-5.9) 30(2.75,-5.9) 31(3.25,-5.9) 32(3.75,-5.9) 49(3.75,5.9) 50(3.25,5.9) 51(2.75,5.9) 52(2.25,5.9) 53(1.75,5.9) 54(1.25,5.9) 55(0.75,5.9) 56(0.25,5.9) 57(-0.25,5.9) 58(-0.75,5.9) 59(-1.25,5.9) 60(-1.75,5.9) 61(-2.25,5.9) 62(-2.75,5.9) 63(-3.25,5.9) 64(-3.75,5.9)
  rect 5.3x5.3 smd: 65(0,0)
QT51A01-38200-7H
  round 0.8 hole 0.8 unplated: (-1.6,13.55) (-1.6,-13.55)
  round 0.7 hole 0.7 unplated: (1.5,13.3) (1.5,-13.3)
  rect 1.8x0.75 smd: 1(-2.5,12.479) 2(2.5,12.479) 99(-2.5,-12.479) 100(2.5,-12.479)
  rect 1.8x0.305 smd: 3(-2.5,11.75) 4(2.5,11.75) 5(-2.5,11.25) 6(2.5,11.25) 7(-2.5,10.75) 8(2.5,10.75) 9(-2.5,10.25) 10(2.5,10.25) 11(-2.5,9.75) 12(2.5,9.75) 13(-2.5,9.25) 14(2.5,9.25) 15(-2.5,8.75) 16(2.5,8.75) 17(-2.5,8.25) 18(2.5,8.25) 19(-2.5,7.75) 20(2.5,7.75) 21(-2.5,7.25) 22(2.5,7.25) 23(-2.5,6.75) 24(2.5,6.75) 25(-2.5,6.25) 26(2.5,6.25) 27(-2.5,5.75) 28(2.5,5.75) 29(-2.5,5.25) 30(2.5,5.25) 31(-2.5,4.75) 32(2.5,4.75) 33(-2.5,4.25) 34(2.5,4.25) 35(-2.5,3.75) 36(2.5,3.75) 37(-2.5,3.25) 38(2.5,3.25) 39(-2.5,2.75) 40(2.5,2.75) 41(-2.5,2.25) 42(2.5,2.25) 43(-2.5,1.75) 44(2.5,1.75) 45(-2.5,1.25) 46(2.5,1.25) 47(-2.5,0.75) 48(2.5,0.75) 49(-2.5,0.25) 50(2.5,0.25) 51(-2.5,-0.25) 52(2.5,-0.25) 53(-2.5,-0.75) 54(2.5,-0.75) 55(-2.5,-1.25) 56(2.5,-1.25) 57(-2.5,-1.75) 58(2.5,-1.75) 59(-2.5,-2.25) 60(2.5,-2.25) 61(-2.5,-2.75) 62(2.5,-2.75) 63(-2.5,-3.25) 64(2.5,-3.25) 65(-2.5,-3.75) 66(2.5,-3.75) 67(-2.5,-4.25) 68(2.5,-4.25) 69(-2.5,-4.75) 70(2.5,-4.75) 71(-2.5,-5.25) 72(2.5,-5.25) 73(-2.5,-5.75) 74(2.5,-5.75) 75(-2.5,-6.25) 76(2.5,-6.25) 77(-2.5,-6.75) 78(2.5,-6.75) 79(-2.5,-7.25) 80(2.5,-7.25) 81(-2.5,-7.75) 82(2.5,-7.75) 83(-2.5,-8.25) 84(2.5,-8.25) 85(-2.5,-8.75) 86(2.5,-8.75) 87(-2.5,-9.25) 88(2.5,-9.25) 89(-2.5,-9.75) 90(2.5,-9.75) 91(-2.5,-10.25) 92(2.5,-10.25) 93(-2.5,-10.75) 94(2.5,-10.75) 95(-2.5,-11.25) 96(2.5,-11.25) 97(-2.5,-11.75) 98(2.5,-11.75)
RJ45_HR911130A
  round 3.175 hole 3.175 unplated: (-5.715,0) (5.715,0)
  round 1.397 hole 0.889: 1(5.72,-8.89) 2(4.45,-6.35) 3(3.18,-8.89) 4(1.91,-6.35) 5(0.64,-8.89) 6(-0.63,-6.35) 7(-1.9,-8.89) 8(-3.17,-6.35) 9(-4.44,-8.89) 10(-5.71,-6.35)
  round 1.524 hole 1.016: 11(6.625,4.9) 12(4.085,4.9) 13(-4.085,4.9) 14(-6.625,4.9)
  round 2.413 hole 1.651: 15(7.745,-3.05) 16(-7.745,-3.05)
SMA
  rect 2.3x2 smd: A(-2,0) K(2,0)
SO8N-1P27-3P9X4P9
  rect 0.61x1.422 smd: 1(-1.905,-2.65) 2(-0.635,-2.65) 3(0.635,-2.65) 4(1.905,-2.65) 5(1.905,2.65) 6(0.635,2.65) 7(-0.635,2.65) 8(-1.905,2.65)
SOD123_AK
  rect 0.813x0.711 smd: A(1.875,0) K(-1.875,0)
SOT23
  rect 1x0.6 smd: 1(-1.15,0.95) 2(-1.15,-0.95) 3(1.15,0)
SOT23-3
  rect 0.8x1.15 smd: 1(-0.95,-1.225) 2(0.95,-1.225) 3(0,1.225)
SOT23-8
  rect 0.4x1.2 smd: 1(-0.975,-1.3)
  oval 0.4x1.2 smd: 2(-0.325,-1.3) 3(0.325,-1.3) 4(0.975,-1.3) 5(0.975,1.3) 6(0.325,1.3) 7(-0.325,1.3) 8(-0.975,1.3)
SOT23-236AB
  rect 0.61x0.914 smd: 1(-0.95,-1) 2(0.95,-1) 3(0,1)
SOT-23
  rect 0.686x0.991 smd: 1(-0.95,-1.295) 2(0,-1.295) 3(0.95,-1.295) 4(0.95,1.295) 5(-0.95,1.295)
SW2_3X6
  rect 1.778x1.016 smd: 1(-3.875,0) 2(3.875,0)
SW6-2P5-5P5
  rect 1.422x1.422 hole 0.813: 1(-2.5,-2.75)
  round 1.422 hole 0.813: 2(0,-2.75) 3(2.5,-2.75) 4(-2.5,2.75) 5(0,2.75) 6(2.5,2.75)
TF-15-15B
  round 1.016 hole 1.016 unplated: (-4.95,-3.5) (3.05,-3.5)
  rect 0.7x1.4 smd: 1(2.25,7.1) 2(1.15,7.1) 3(0.05,7.1) 4(-1.05,7.1) 5(-2.15,7.1) 6(-3.25,7.1) 7(-4.35,7.1) 8(-5.45,7.1) 9(-6.55,7.1)
  rect 1.6x1.4 smd: 10(-8,6.5) 11(6.85,6.5)
  rect 1.2x2.2 smd: 12(-7.75,-3.1) 13(7.75,-3.1)
TP4
  round 1 smd: 1(0,0)
unnamed#2
  round 1.016 smd: 1(0,0)
USBMICRO_H
  round 0.61 hole 0.61 unplated: (-2,-1.264) (2,-1.264)
  rect 0.406x1.778 smd: 1(-1.3,0) 2(-0.65,0) 3(0,0) 4(0.65,0) 5(1.3,0)
  oval 1.016x1.778 hole 0.508x1.27: 6(-3.6,0.056) 7(3.6,0.056) 8(-3.6,-3.414) 9(3.6,-3.414)
  rect 1.118x1.016 smd: 10(-1.5,-4.564) 11(1.5,-4.564)
XH2_1X2_2P54MM
  oval 2.032x1.524 hole 1.016: 1(0,-1.27) 2(0,1.27)
XTAL3225M
  rect 1.2x1.2 smd: 1(-1.2,-0.95) 2(1.2,-0.95) 3(1.2,0.95) 4(-1.2,0.95)

## Nets
3.3V_PCIE: J11.A9(+3V3_2) J11.A10(+3V3_3) J11.B8(+3V3_1) R79.1 R80.2
5V_HDMI: F2.2 J8.18(5V0) R29.2 R31.2
5V_HDMI_RX: J10.18(5V0) R66.1 R67.1 R68.1 R71.1 U24.64(RXA_5V) U25.8(VCC)
12V_PCIE: D5.A J11.A2(+12V_4) J11.A3(+12V_5) J11.B1(+12V_1) J11.B2(+12V_2) J11.B3(+12V_3)
GND: C1.1 C2.1 C3.2 C4.1 C5.1 C6.2 C7.1 C8.1 C9.2 C10.2 C11.2 C12.2 C13.2 C14.2 C15.2 C16.2 C17.2 C18.2 C19.2 C20.2 C21.2 C22.2 C23.2 C24.2 C25.2 C26.2 C27.2 C28.2 C29.2 C30.2 C31.2 C32.2 C33.2 C35.1 C36.1 C37.1 C38.1 C39.2 C40.1 C41.1 C44.1 C45.1 C46.1 C47.1 C48.1 C50.1 C51.1 C52.2 C54.2 C55.2 C56.2 C57.2 C58.2 C59.2 C60.2 C61.2 C62.2 C63.2 C64.2 C65.2 C66.2 C77.2 C78.2 C79.2 C80.2 C81.2 C82.2 C83.2 C84.2 C85.2 C86.2 C87.2 C88.2 C89.2 C90.2 C91.2 C92.2 C93.2 D1.1 D2.1 D3.1 D4.1 D7.A J1.2 J1.10 J3.2 J4.5(GND) J4.6 J4.7 J4.8 J4.9 J4.10 J4.11 J5.6(VSS#6) J5.10(VSS#10) J5.11(VSS#11) J5.12(VSS#12) J5.13(VSS#13) J6.12(LED_G-) J7.12(LED_G-) J8.2(D2S) J8.5(D1S) J8.8(D0S) J8.11(CLKS) J8.17(DCC/CECG) J8.BO1 J8.BO2 J8.BO3 J8.BO4 J9.2(GND2) J9.3(GND1) J10.2(D2S) J10.5(D1S) J10.8(D0S) J10.11(CLKS) J10.17(DCC/CECG) J10.BO1 J10.BO2 J10.BO3 J10.BO4 J11.A4(GND12) J11.A12(GND13) J11.A15(GND14) J11.A18(GND15) J11.A20(GND16) J11.A23(GND17) J11.A24(GND18) J11.A27(GND19) J11.A28(GND20) J11.A31(GND21) J11.B4(GND1) J11.B7(GND2) J11.B13(GND3) J11.B16(GND4) J11.B18(GND5) J11.B21(GND6) J11.B22(GND7) J11.B25(GND8) J11.B26(GND9) J11.B29(GND10) J11.B32(GND11) JM1.9 JM1.10 JM1.19 JM1.20 JM1.29 JM1.30 JM1.39 JM1.40 JM1.49 JM1.50 JM1.59 JM1.60 JM1.69 JM1.70 JM1.79 JM1.80 JM1.89 JM1.90 JM1.99 JM1.100 JM2.5 JM2.6 JM2.11 JM2.12 JM2.17 JM2.18 JM2.23 JM2.24 JM2.29 JM2.30 JM2.39 JM2.40 JM2.49 JM2.50 JM2.59 JM2.60 JM2.69 JM2.70 JM2.79 JM2.80 JM2.89 JM2.90 JM2.99 JM2.100 JM3.19 JM3.20 JM3.29 JM3.30 JM3.39 JM3.40 JM3.49 JM3.50 JM3.59 JM3.60 JM3.69 JM3.70 JM3.79 JM3.80 JM3.89 JM3.90 JM3.99 JM3.100 JP1.12 JP1.30 JP2.12 JP2.30 K1.1 K2.1 K3.1 M1.1 M2.1 M3.1 M4.1 Q5.2(E) Q6.2(S) Q7.2(S) R9.1 R14.1 R26.1 R27.1 R30.1 R32.1 R33.2 R37.2 R38.1 R47.2 R48.2 R51.2 R56.1 R57.1 R60.1 R61.1 R70.2 R74.2 U1.3(GND) U1.29(PGND) U3.2(GND#2) U3.11(GND#11) U3.25(PGND) U6.57(PAD) U7.65(EPAD) U10.3(GND#3) U10.8(GND#8) U15.2(PGND) U15.4(NC) U15.10(AGND) U16.4(GND#4) U16.6(GND#6) U17.4(GND#4) U17.6(GND#6) U18.4(GND#4) U18.6(GND#6) U19.3(GND#3) U19.8(GND#8) U20.3(GND#3) U20.8(GND#8) U21.3(GND#3) U21.8(GND#8) U22.3(GND#3) U22.8(GND#8) U23.2(GND) U24.65(EPAD) U25.1(A0) U25.2(A1) U25.3(A2) U25.4(GND) U28.3(GND#3) U28.8(GND#8) U29.3(GND#3) U29.8(GND#8) U30.3(GND#3) U30.8(GND#8) U31.3(GND#3) U31.8(GND#8) Y2.2(GND#2) Y2.4(GND#4) Y3.2(GND#2) Y3.4(GND#4)
PVDD_1V8: B9.2 C65.1 C89.1 U24.57(PVDD)
VCC_1V0: C16.1 C17.1 C43.1 C46.2 C47.2 L2.2 R55.2 U6.6(DVDD#6) U6.42(DVDD#42) U16.5(VOUT)
VCC_1V8: B4.2 B9.1 B10.1 C10.1 C42.1 C44.2 C45.2 C61.1 C62.1 C63.1 C92.1 C93.1 L3.2 L5.2 L6.2 L7.2 R8.2 R54.2 U3.5(VCCA) U17.5(VOUT) U24.24(DVDD) U24.40(DVDD_1) U24.52(DVDD_2) U24.60(DVDD_3)
VCC_3V3: B1.1 B2.1 B3.1 B5.2 B11.1 C7.2 C8.2 C9.1 C20.1 C21.1 C22.1 C31.1 C32.1 C33.1 C49.1 C50.2 C51.2 C58.1 C59.1 C60.1 C90.1 C91.1 D8.A D9.A J5.4(VCC) JP1.29 JP2.29 L4.2 R10.2 R11.2 R13.2 R15.1 R16.1 R17.1 R21.1 R23.2 R24.1 R25.1 R34.1 R35.1 R36.1 R58.2 R59.2 R72.1 R75.2 R81.2 U3.17(VCCB1) U3.21(VCCB0) U6.10(VDDO_SEL) U6.11(VDDO#11) U6.49(VDDO#49) U6.52(VDDO#52) U7.29(DVDD_3V) U18.5(VOUT) U23.3(EN) U24.23(DVDDIO) U24.34(DVDDIO_1) U24.44(DVDDIO_2)
VCC_5V: C35.2 C36.2 C40.2 C41.2 C48.2 C55.1 F2.1 JP1.11 JP2.11 L1.2 R52.2 R53.2 U15.5(VOUT) U16.2(VIN) U17.2(VIN) U18.2(VIN) U23.1(VIN)
VCC_12V: C1.2 C2.2 C37.2 C38.2 D5.K D6.A J3.1 JM3.1 JM3.2 JM3.3 JM3.4 JM3.5 JM3.6 JM3.7 JM3.8 Q3.D R45.1 U15.1(VIN)
VCC_MOD_3V3: C77.1 D1.2 D2.2 D3.2 D4.2 J1.4 J1.6 JM3.11 JM3.13
VCC_UART_3V3: C3.1 R7.1 U1.6(VDD)
VDD_USB2UART_5V: C4.2 C5.2 J4.1(VDD) U1.7(REGIN) U1.8(VBUS)
7513_AVDD_1V8: C80.1 C81.1 C82.1 C83.1 L6.1 U7.15(AVDD#15) U7.19(AVDD#19) U7.25(AVDD#25)
7513_DVDD_1V8: C28.1 C29.1 C30.1 C78.1 C79.1 L5.1 U7.1(DVDD#1) U7.11(DVDD#11) U7.31(DVDD#31) U7.51(DVDD#51)
7513_PVDD_1V8: C84.1 C85.1 C86.1 L7.1 U7.12(PVDD) U7.13(BGVDD)
CEC: J8.13(CEC) U10.1(IN1) U10.10(OUT1)
CEC_CLK: R32.2 U7.32(CEC_CLK)
CEC_IO: R30.2 U7.30(CEC)
CON_SD_CLK: J5.5(CLK) R11.1 U3.19(CLKB0)
CON_SD_CMD: J5.3(CMD) R10.1 U3.20(CMDB0)
CON_SD_DATA0: J5.7(DAT0) U3.18(DATA0B0)
CON_SD_DATA1: J5.8(DAT1) U3.16(DATA1B0)
CON_SD_DATA2: J5.1(DAT2) U3.23(DATA2B0)
CON_SD_DATA3: J5.2(DAT3) U3.22(DATA3B0)
CVDD_1V8: B10.2 C64.1 C88.1 U24.2(CVDD) U24.14(CVDD_1)
DDCSCL: J8.15(SCL) R29.1 U7.33(DDCSCL) U10.2(IN2) U10.9(OUT2)
DDCSDA: J8.16(SDA) R31.1 U7.34(DDCSDA) U10.4(IN3) U10.7(OUT3)
ETH0_MDI0_N: J6.3(MDI0-) JM3.84 U19.2(IN2) U19.9(OUT2)
ETH0_MDI0_P: J6.2(MDI0+) JM3.82 U19.1(IN1) U19.10(OUT1)
ETH0_MDI1_N: J6.7(MDI1-) JM3.88 U19.5(IN4) U19.6(OUT4)
ETH0_MDI1_P: J6.4(MDI1+) JM3.86 U19.4(IN3) U19.7(OUT3)
ETH0_MDI2_N: J6.6(MDI2-) JM3.94 U20.2(IN2) U20.9(OUT2)
ETH0_MDI2_P: J6.5(MDI2+) JM3.92 U20.1(IN1) U20.10(OUT1)
ETH0_MDI3_N: J6.9(MDI3-) JM3.98 U20.5(IN4) U20.6(OUT4)
ETH0_MDI3_P: J6.8(MDI3+) JM3.96 U20.4(IN3) U20.7(OUT3)
ETH1_25M_XI: C26.1 R28.1 U6.34(XTAL_IN) Y2.1(NC)
ETH1_25M_XO: C27.1 R28.2 U6.33(XTAL_OUT) Y2.3(OUT)
ETH1_MDI0_N: J7.3(MDI0-) U6.27(MDIN[0]) U21.2(IN2) U21.9(OUT2)
ETH1_MDI0_P: J7.2(MDI0+) U6.28(MDIP[0]) U21.1(IN1) U21.10(OUT1)
ETH1_MDI1_N: J7.7(MDI1-) U6.23(MDIN[1]) U21.5(IN4) U21.6(OUT4)
ETH1_MDI1_P: J7.4(MDI1+) U6.24(MDIP[1]) U21.4(IN3) U21.7(OUT3)
ETH1_MDI2_N: J7.6(MDI2-) U6.21(MDIN[2]) U22.2(IN2) U22.9(OUT2)
ETH1_MDI2_P: J7.5(MDI2+) U6.22(MDIP[2]) U22.1(IN1) U22.10(OUT1)
ETH1_MDI3_N: J7.9(MDI3-) U6.17(MDIN[3]) U22.5(IN4) U22.6(OUT4)
ETH1_MDI3_P: J7.8(MDI3+) U6.18(MDIP[3]) U22.4(IN3) U22.7(OUT3)
ETH1_NRST: JM1.4 R21.2 U6.16(RESETN)
ETH1_RGMII_MDC: JM1.6 U6.7(MDC)
ETH1_RGMII_MDIO: JM1.8 R24.2 U6.8(MDIO)
ETH1_RXCK: JM1.22 U6.46(RX_CLK)
ETH1_RXCTL: JM1.12 U6.43(RX_CTRL)
ETH1_RXD0: JM1.14 U6.44(RXD[0])
ETH1_RXD1: JM1.16 U6.45(RXD[1])
ETH1_RXD2: JM1.18 U6.47(RXD[2])
ETH1_RXD3: JM1.24 U6.48(RXD[3])
ETH1_TXCK: JM1.32 U6.53(TX_CLK)
ETH1_TXCTL: JM1.38 U6.56(TX_CTRL)
ETH1_TXD0: JM1.26 U6.50(TXD[0])
ETH1_TXD1: JM1.28 U6.51(TXD[1])
ETH1_TXD2: JM1.34 U6.54(TXD[2])
ETH1_TXD3: JM1.36 U6.55(TXD[3])
FPGA_TCK: D2.3 JM3.15 R2.1
FPGA_TDI: D4.3 JM3.21 R82.1
FPGA_TDO: D3.3 JM3.17 R3.1
FPGA_TMS: D1.3 JM3.23 R4.1
GPIO1_0N: JM1.83 JP1.2
GPIO1_0P: JM1.81 JP1.1
GPIO1_1N: JM1.44 JP1.4
GPIO1_1P: JM1.42 JP1.3
GPIO1_2N: JM1.48 JP1.6
GPIO1_2P: JM1.46 JP1.5
GPIO1_3N: JM1.54 JP1.8
GPIO1_3P: JM1.52 JP1.7
GPIO1_4N: JM1.58 JP1.10
GPIO1_4P: JM1.56 JP1.9
GPIO1_5N: JM1.64 JP1.14
GPIO1_5P: JM1.62 JP1.13
GPIO1_6N: JM1.68 JP1.16
GPIO1_6P: JM1.66 JP1.15
GPIO1_7N: JM1.74 JP1.18
GPIO1_7P: JM1.72 JP1.17
GPIO1_8N: JM1.78 JP1.20
GPIO1_8P: JM1.76 JP1.19
GPIO1_9N: JM1.84 JP1.22
GPIO1_9P: JM1.82 JP1.21
GPIO1_10N: JM1.88 JP1.24
GPIO1_10P: JM1.86 JP1.23
GPIO1_11N: JM1.94 JP1.26
GPIO1_11P: JM1.92 JP1.25
GPIO1_12N: JM1.98 JP1.28
GPIO1_12P: JM1.96 JP1.27
GPIO1_13N: JM1.97 JP1.32
GPIO1_13P: JM1.95 JP1.31
GPIO1_14N: JM1.87 JP1.34
GPIO1_14P: JM1.85 JP1.33
GPIO1_15N: JM1.77 JP1.36
GPIO1_15P: JM1.75 JP1.35
GPIO1_16N: JM1.73 JP1.38
GPIO1_16P: JM1.71 JP1.37
GPIO1_17N: JM1.67 JP1.40
GPIO1_17P: JM1.65 JP1.39
GPIO2_0N: JM1.63 JP2.2
GPIO2_0P: JM1.61 JP2.1
GPIO2_1N: JM1.57 JP2.4
GPIO2_1P: JM1.55 JP2.3
GPIO2_2N: JM1.53 JP2.6
GPIO2_2P: JM1.51 JP2.5
GPIO2_3N: JM1.47 JP2.8
GPIO2_3P: JM1.45 JP2.7
GPIO2_4N: JM1.43 JP2.10
GPIO2_4P: JM1.41 JP2.9
GPIO2_5N: JM1.37 JP2.14
GPIO2_5P: JM1.35 JP2.13
GPIO2_6N: JM1.33 JP2.16
GPIO2_6P: JM1.31 JP2.15
GPIO2_7N: JM3.58 JP2.18
GPIO2_7P: JM3.56 JP2.17
GPIO2_8N: JM3.54 JP2.20
GPIO2_8P: JM3.52 JP2.19
GPIO2_9N: JM1.23 JP2.22
GPIO2_9P: JM1.21 JP2.21
GPIO2_10N: JM3.48 JP2.24
GPIO2_10P: JM3.46 JP2.23
GPIO2_11N: JM3.44 JP2.26
GPIO2_11P: JM3.42 JP2.25
GPIO2_12N: JM3.38 JP2.28
GPIO2_12P: JM3.36 JP2.27
GPIO2_13N: JM3.34 JP2.32
GPIO2_13P: JM3.32 JP2.31
GPIO2_14N: JM3.57 JP2.34
GPIO2_14P: JM3.55 JP2.33
GPIO2_15N: JM3.53 JP2.36
GPIO2_15P: JM3.51 JP2.35
GPIO2_16N: JM3.47 JP2.38
GPIO2_16P: JM3.45 JP2.37
GPIO2_17N: JM3.43 JP2.40
GPIO2_17P: JM3.41 JP2.39
HDMI_HPD: J8.19(HPD) R33.1 U7.16(HPD) U10.5(IN4) U10.6(OUT4)
HDMI_RX_DE: JM3.24 U24.45(DE)
HDMI_RX_HS: JM3.26 U24.46(HS)
HDMI_RX_INT: JM1.2 R81.1 U24.55(INT1)
HDMI_RX_LLC: JM2.81 U24.25(LLC)
HDMI_RX_LRCLK: JM1.5 U24.50(LRCLK)
HDMI_RX_MCLK: JM1.3 U24.51(MCLK/INT2)
HDMI_RX_P0: JM3.22 U24.43(P0)
HDMI_RX_P1: JM3.31 U24.42(P1)
HDMI_RX_P2: JM3.33 U24.41(P2)
HDMI_RX_P3: JM3.35 U24.39(P3)
HDMI_RX_P4: JM3.37 U24.38(P4)
HDMI_RX_P5: JM2.45 U24.37(P5)
HDMI_RX_P6: JM2.47 U24.36(P6)
HDMI_RX_P7: JM2.51 U24.35(P7)
HDMI_RX_P8: JM2.53 U24.33(P8)
HDMI_RX_P9: JM2.55 U24.32(P9)
HDMI_RX_P10: JM2.57 U24.31(P10)
HDMI_RX_P11: JM2.61 U24.30(P11)
HDMI_RX_P12: JM2.63 U24.29(P12)
HDMI_RX_P13: JM2.65 U24.28(P13)
HDMI_RX_P14: JM2.67 U24.27(P14)
HDMI_RX_P15: JM2.71 U24.26(P15)
HDMI_RX_P16: JM2.73 U24.22(P16)
HDMI_RX_P17: JM2.75 U24.21(P17)
HDMI_RX_P18: JM2.77 U24.20(P18)
HDMI_RX_P19: JM2.83 U24.19(P19)
HDMI_RX_P20: JM2.85 U24.18(P20)
HDMI_RX_P21: JM2.87 U24.17(P21)
HDMI_RX_P22: JM2.95 U24.16(P22)
HDMI_RX_P23: JM2.97 U24.15(P23)
HDMI_RX_RST: JM2.31 R75.1 U24.56(*RESET)
HDMI_RX_SCLK: JM1.7 U24.49(SCLK/INT2)
HDMI_RX_SPDIF: JM1.1 U24.48(AP)
HDMI_RX_VS: JM3.28 U24.47(VS/FIELD/ALSB)
HDMI_SCL: JM2.43 R35.2 U7.35(SCL) U24.53(SCL)
HDMI_SDA: JM2.41 R36.2 U7.36(SDA) U24.54(SDA)
HDMI_TX_CLK: JM2.62 U7.53(CLK)
HDMI_TX_D0: JM2.92 U7.62(D0)
HDMI_TX_D1: JM2.88 U7.61(D1)
HDMI_TX_D2: JM2.86 U7.60(D2)
HDMI_TX_D3: JM2.84 U7.59(D3)
HDMI_TX_D4: JM2.82 U7.58(D4)
HDMI_TX_D5: JM2.78 U7.57(D5)
HDMI_TX_D6: JM2.76 U7.56(D6)
HDMI_TX_D7: JM2.74 U7.55(D7)
HDMI_TX_D8: JM2.72 U7.54(D8)
HDMI_TX_D9: JM2.68 U7.52(D9)
HDMI_TX_D10: JM2.66 U7.50(D10)
HDMI_TX_D11: JM2.64 U7.49(D11)
HDMI_TX_D12: JM2.58 U7.48(D12)
HDMI_TX_D13: JM2.56 U7.47(D13)
HDMI_TX_D14: JM2.54 U7.46(D14)
HDMI_TX_D15: JM2.52 U7.45(D15)
HDMI_TX_D16: JM2.48 U7.44(D16)
HDMI_TX_D17: JM2.46 U7.43(D17)
HDMI_TX_D18: JM2.44 U7.42(D18)
HDMI_TX_D19: JM2.42 U7.41(D19)
HDMI_TX_D20: JM2.38 U7.40(D20)
HDMI_TX_D21: JM2.36 U7.39(D21)
HDMI_TX_D22: JM2.34 U7.38(D22)
HDMI_TX_D23: JM2.32 U7.37(D23)
HDMI_TX_DE: JM2.94 U7.63(DE)
HDMI_TX_HS: JM2.96 U7.64(HSYNC)
HDMI_TX_INT: JM2.35 R34.2 U7.28(INT)
HDMI_TX_VS: JM2.98 U7.2(VSYNC)
NRSTIN: JM3.16 R18.1
PCIE_CLK_N: C76.1 JM2.1
PCIE_CLK_P: C75.1 JM2.3
PCIE_PERSTN: J11.A11(PERST_N) JM2.37 R80.1
PCIE_PRSNTN_X1: J11.B17(PRSNT2_N_X1) R77.2
PCIE_PRSNTN_X4: J11.B31(PRSNT2_N_X4) R78.2
PCIE_RX0_N: J11.B15(PET0_N) JM2.26
PCIE_RX0_P: J11.B14(PET0_P) JM2.28
PCIE_RX1_N: J11.B20(PET1_N) JM2.20
PCIE_RX1_P: J11.B19(PET1_P) JM2.22
PCIE_RX2_N: J11.B24(PET_2N) JM2.14
PCIE_RX2_P: J11.B23(PET_2P) JM2.16
PCIE_RX3_N: J11.B28(PET3_N) JM2.8
PCIE_RX3_P: J11.B27(PET3_P) JM2.10
PCIE_TX0_N: C68.1 JM2.25
PCIE_TX0_P: C67.1 JM2.27
PCIE_TX1_N: C70.1 JM2.19
PCIE_TX1_P: C69.1 JM2.21
PCIE_TX2_N: C72.1 JM2.13
PCIE_TX2_P: C71.1 JM2.15
PCIE_TX3_N: C74.1 JM2.7
PCIE_TX3_P: C73.1 JM2.9
PG_1V0: R53.1 U16.1(PG)
PG_1V8: R52.1 U17.1(PG)
PG_3V3: R50.1 R58.1 R84.1 U18.1(PG)
PG_5V: R49.2 R64.1 R83.1 U15.3(PG) U16.8(EN)
PG_MOD: JM3.14 R65.1
PHY0_LED0: J6.13(LED_Y-) JM3.78
PHY0_LED1: JM3.76 R12.2
PHY1_LED0: J7.13(LED_Y-) U6.14(LED[0])
PHY1_LED1: R22.2 U6.13(LED[1])
PHY_AVDDH3V3: B5.1 C23.1 C24.1 U6.20(AVDD33#20) U6.25(AVDD33#25)
PHY_AVDDL1V8: B4.1 C18.1 C19.1 U6.3(AVDD18#3) U6.19(AVDD18#19) U6.26(AVDD18#26) U6.35(AVDDC18) U6.38(AVDD18#38)
PL_KEY1: JM1.25 R20.1
PL_KEY2: JM1.27 R19.1
PL_LED1: JM1.17 R62.1
PL_LED2: JM1.15 R63.1
PWR_EN: JM3.12
RX_CEC: R69.1 U24.61(CEC)
RX_DDCSCL: J10.15(SCL) R66.2 U24.62(DDCA_SCL) U25.6(SCL)
RX_DDCSDA: J10.16(SDA) R67.2 U24.63(DDCA_SDA) U25.5(SDA)
RX_HPA: J10.19(HPD) Q7.3(D) R68.2 U24.1(HPA_A/INT2)
RX_HPD_CTRL: JM2.33 R73.1
SD_CLK: JM3.73 U3.9(CLKA)
SD_CMD: JM3.75 U3.4(CMDA)
SD_DATA0: JM3.77 U3.6(DATA0A)
SD_DATA1: JM3.81 U3.7(DATA1A)
SD_DATA2: JM3.83 U3.1(DATA2A)
SD_DATA3: JM3.85 U3.3(DATA3A)
TMDS_RX0_N: J10.9(D0-) U24.6(RXA_0-) U31.2(IN2) U31.9(OUT2)
TMDS_RX0_P: J10.7(D0+) U24.7(RXA_0+) U31.1(IN1) U31.10(OUT1)
TMDS_RX1_N: J10.6(D1-) U24.9(RXA_1-) U30.5(IN4) U30.6(OUT4)
TMDS_RX1_P: J10.4(D1+) U24.10(RXA_1+) U30.4(IN3) U30.7(OUT3)
TMDS_RX2_N: J10.3(D2-) U24.12(RXA_2-) U30.2(IN2) U30.9(OUT2)
TMDS_RX2_P: J10.1(D2+) U24.13(RXA_2+) U30.1(IN1) U30.10(OUT1)
TMDS_RXC_N: J10.12(CLK-) U24.3(RXA_C-) U31.5(IN4) U31.6(OUT4)
TMDS_RXC_P: J10.10(CLK+) U24.4(RXA_C+) U31.4(IN3) U31.7(OUT3)
TMDS_TX0_N: J8.9(D0-) U7.20(TX0-) U28.2(IN2) U28.9(OUT2)
TMDS_TX0_P: J8.7(D0+) U7.21(TX0+) U28.1(IN1) U28.10(OUT1)
TMDS_TX1_N: J8.6(D1-) U7.23(TX1-) U29.5(IN4) U29.6(OUT4)
TMDS_TX1_P: J8.4(D1+) U7.24(TX1+) U29.4(IN3) U29.7(OUT3)
TMDS_TX2_N: J8.3(D2-) U7.26(TX2-) U29.2(IN2) U29.9(OUT2)
TMDS_TX2_P: J8.1(D2+) U7.27(TX2+) U29.1(IN1) U29.10(OUT1)
TMDS_TXC_N: J8.12(CLK-) U7.17(TXC-) U28.5(IN4) U28.6(OUT4)
TMDS_TXC_P: J8.10(CLK+) U7.18(TXC+) U28.4(IN3) U28.7(OUT3)
TVDD_3V3: B11.2 C66.1 C87.1 U24.5(TVDD) U24.8(TVDD_1) U24.11(TVDD_2)
UART_RX: JM3.72 U1.26(TXD)
UART_TX: JM3.74 U1.25(RXD)
USB2UART_DM: R5.2 U1.5(DM)
USB2UART_DP: R6.2 U1.4(DP)
VIOTA: B1.2 B8.2 JM1.91 JM1.93
VIOTB: B2.2 JM1.11 JM1.13
VIOTC: B3.2 JM2.91 JM2.93
WARM_NRST: JM3.18
XADC_VN: JM3.68
XADC_VP: JM3.66
N18052688: C6.1 R7.2 U1.9(\\R\S\T)
N18052822: J4.3(DP) R6.1
N18052826: J4.2(DM) R5.1
N18058952: F1.1 J9.1(VCC)
N18080734: R83.2 R84.2 U17.8(EN)
N18080771: C42.2 R54.1 R57.2 U17.7(FB)
N18080863: L3.1 U17.3(SW)
N18080938: C43.2 R55.1 R56.2 U16.7(FB)
N18081069: L2.1 U16.3(SW)
N18081721: R45.2 R48.1 U15.11(EN)
N18081879: R39.1 U15.8(BST)
N18081884: C34.2 R39.2
N18081899: C34.1 L1.1 U15.7(SW)
N18082651: C39.1 R49.1 U15.9(VCC)
N18395071: R64.2 R65.2 U18.8(EN)
N18395099: C49.2 R59.1 R60.2 U18.7(FB)
N18395188: L4.1 U18.3(SW)
N18395932: D7.K R41.2 R44.1
N18395945: Q3.G Q4.3(COLLECTOR) R42.2 R43.2 SW1.2 SW1.5
N18395979: R43.1 R51.1 SW1.1 SW1.4
N18396043: D6.K R46.1
N18396075: Q2.G R40.2 R47.1
N18396077: Q5.1(B) R50.2
N18396081: Q5.3(C) R46.2
N18396093: Q2.S Q3.S Q4.2(EMITTER) R40.1 R41.1 R42.1
N18396139: Q4.1(BASE) R44.2
N18396348: F1.2 Q2.D
N18436851: B8.1 C54.1 U23.5(VOUT)
N18566458: J6.11(LED_G+) R12.1
N18566480: J6.14(LED_Y+) R13.1
N18566494: C12.1 J6.10(PGND) J6.15(SHIELD1) J6.16(SHIELD2) R14.2
N18566614: C11.1 J6.1(CT)
N18568990: J7.14(LED_Y+) R23.1
N18568992: J7.11(LED_G+) R22.1
N18569013: C52.1 J7.10(PGND) J7.15(SHIELD1) J7.16(SHIELD2) R61.2
N18569047: R25.2 R27.2 U6.15(CONFIG)
N18569090: C25.1 J7.1(CT)
N18569358: R26.2 U6.30(RSET)
N18571693: R37.1 U7.14(R_EXT)
N18572131: R38.2 U7.22(PD)
N18580617: J10.13(CEC) R69.2
N18598253: C56.1 R76.1 U24.58(XTALP) Y3.1(NC)
N18598257: C57.1 R76.2 U24.59(XTALN) Y3.3(OUT)
N18602827: Q6.3(D) Q7.1(G) R71.2
N18602846: Q6.1(G) R72.2 R73.2 R74.1
N18610140: R70.1 U25.7(WP)
N18612495: C72.2 J11.A26(PER2_N)
N18612497: C70.2 J11.A22(PER1_N)
N18612499: C69.2 J11.A21(PER1_P)
N18612501: C74.2 J11.A30(PER3_N)
N18612503: C68.2 J11.A17(PER0_N)
N18612505: C73.2 J11.A29(PER3_P)
N18612507: C67.2 J11.A16(PER0_P)
N18612509: C71.2 J11.A25(PER2_P)
N18612627: J11.A1(PRSNT1_N) R77.1 R78.1
N18612689: J11.B10(+3V3_AUX) R79.2
N18639230: C76.2 J11.A14(REFCLK-)
N18639232: C75.2 J11.A13(REFCLK+)
N18644856: C15.1 K3.2 R17.2 R20.2
N18644974: C13.1 K1.2 R16.2 R18.2
N18645048: C14.1 K2.2 R15.2 R19.2
N18645823: R8.1 R9.2 U3.24(SEL)
N18645972: J5.9(CD) TP1.1
N18675647: J1.5 R4.2
N18675649: J1.3 R3.2
N18675651: J1.1 R2.2
N18675661: J1.9 R82.2
N186454390: D8.K R62.2
N186454510: D9.K R63.2

Pads without a net: J1 7 8; J4 4; J8 14; J10 14; J11 A5 A6 A7 A8 A19 A32 B5 B6 B9 B11 B12 B30; JM2 2 4; JM3 9 10 25 27 61 62 63 64 65 67 71 87 91 93 95 97; NOREF#5 1; NOREF#6 1; NOREF#16 1; NOREF#33 1; NOREF#34 1; NOREF#35 1; SW1 3 6; U1 1 2 10 11 12 13 14 15 16 17 18 19 20 21 22 23 24 27 28; U3 8 10 12 13 14 15; U6 1 2 4 5 9 12 29 31 32 36 37 39 40 41; U7 3 4 5 6 7 8 9 10; U15 6 12; U23 4

## Via types
v1: diameter 0.61, hole 0.305, TOP to BOTTOM, 45 vias

## Routing (per net, layer and track width the routed paths; a pad name or vN(x,y) marks a point on that pad's centre or on a via; arc(x,y) is an arc through that point)
GND:
  vias: v1(27.28,45.15) v1(27.28,43.12) v1(27.28,27.04) v1(27.28,25.01) v1(27.28,22.98) v1(27.57,47.45) v1(28.57,67.45) v1(28.57,66.18) v1(29.31,47.18) v1(29.31,45.15) v1(29.31,43.12) v1(29.31,27.04) v1(29.31,25.01) v1(29.31,22.98) v1(29.52,95.96) v1(29.52,94.05) v1(29.84,67.45) v1(29.84,66.18) v1(29.84,64.91) v1(29.84,63.64) v1(29.84,62.37) v1(30.61,95.07) v1(31.11,67.45) v1(31.11,66.18) v1(31.11,64.91) v1(31.11,63.64) v1(31.11,62.37) v1(31.34,47.18) v1(31.34,45.15) v1(31.34,43.12) v1(31.34,27.04) v1(31.34,25.01) v1(31.34,22.98) v1(31.68,96.09) v1(31.68,94.05) v1(32.38,66.18) v1(32.38,64.91) v1(32.38,63.64) v1(32.38,62.37) v1(33.65,67.45) v1(33.65,66.18) v1(33.65,64.91) v1(33.65,63.64) v1(33.65,62.37) v1(48.09,87.57)

## Text on the board
User.Comments: CR_UNNAMED_1
Ref Des/Silkscreen Top: PWR LED | ETH0 | ETH1 | HDMIRX | HDMITX | JTAG | UART | SD | GPIO1 | FAN | DC12V | RST | KEY2 | KEY1 | LED1 | LED2 | GPIO2
User.8: 100 | 99 | 2 | 1 | JM2 | JM1 | JM3
User.9: 100 | 99 | 2 | 1 | 3 | 27 | 25 | 54 | 60 | JM2 | JM1 | JM3 | 50 | 44 | 20
User.10: 100 | 99 | JM2 | JM3 | 2 | 1 | JM1
User.22: FIGURE | SIZE | 10.0 | 12.0 | 20.0 | 32.0 | 35.0 | 39.37 | 40.0 | 65.0 | 126.0 | 24.0 | 27.56 | 31.496 | 125.0 | 174.0 | 50.0x20.0 | 106.299x35.429 | 118.11x39.37 | DRILL CHART: TOP to BOTTOM | ALL UNITS ARE IN MILS | TOLERANCE | +3.0/-3.0 | +2.0/-2.0 | +2.0/-0.0 | PLATED | NON-PLATED | QTY | 780 | 156 | 32 | 6 | 20 | 80 | 10 | 4 | 2 | 8 | 1
